# Altium PCB volume_knob.PcbDoc
Units mil, origin at the board's own origin, x right, y up, seen from the top; angles counter-clockwise.
Board outline 748.03 x 629.92 mil, 2 copper layers (Top Layer, Bottom Layer), stack 13.78 mil thick; 20 components, 16 nets, 77 pads, 37 vias.
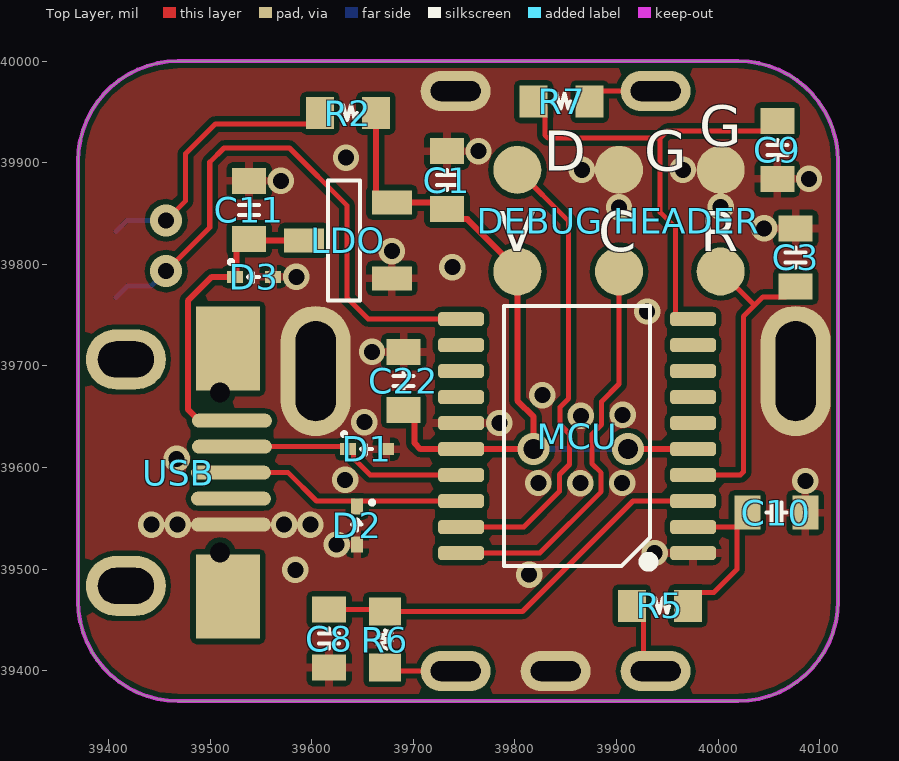
[diagram p0: Top Layer view]
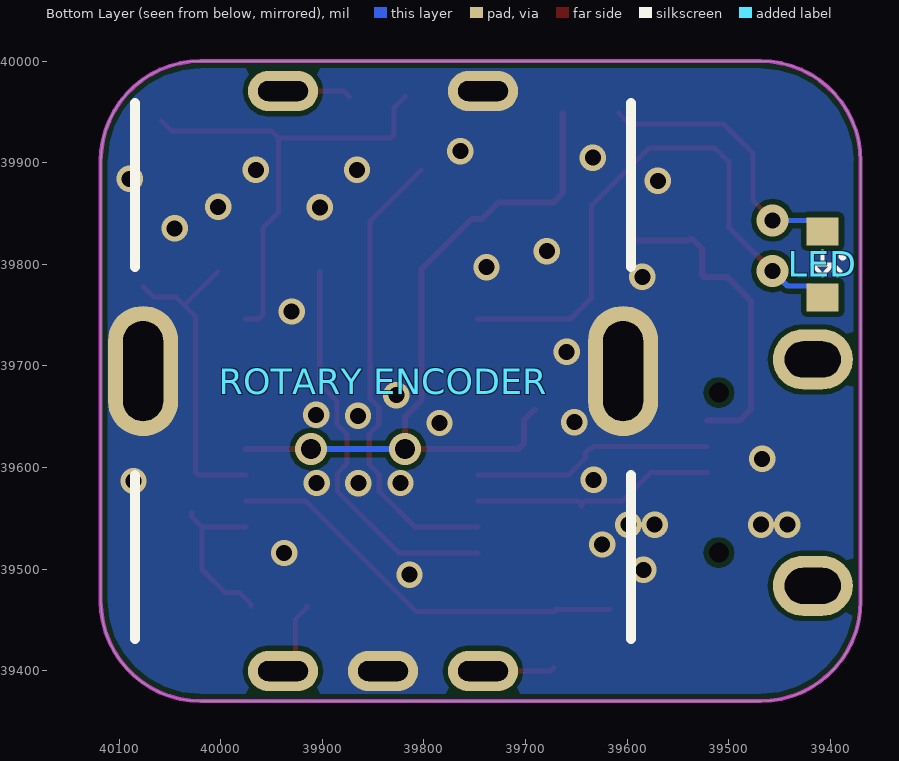
[diagram p1: Bottom Layer view, seen from below]
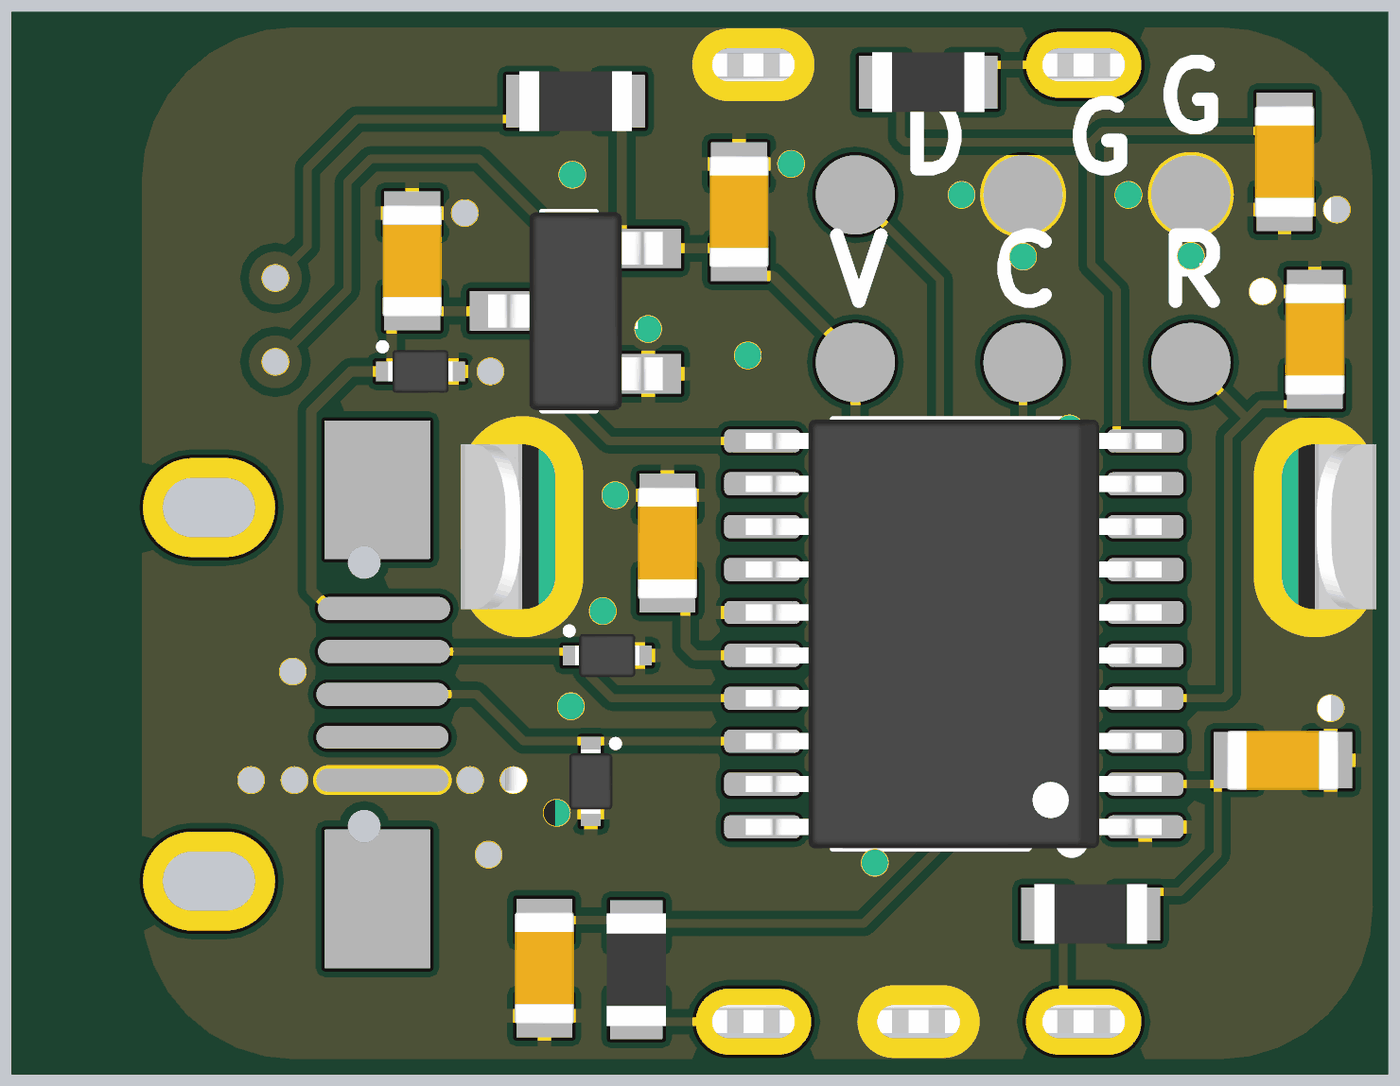
[diagram p2: 3D render of the assembled board from above, using the file's embedded part models]

## Layer stack, top to bottom
Top Solder: solder mask 1, SM-001, Dk 4
Top Layer: signal copper 1.378
Dielectric 1: core 11.0236, Core-043, Dk 4.3
Bottom Layer: signal copper 1.378
Bottom Solder: solder mask 1, SM-001, Dk 4

## Board outline
39370.08,39468.5 39370.08,39901.57 cw(c39468.5,39901.57) 39468.5,40000 40019.32,40000 40019.68,40000 cw(c40019.68,39901.57) 40118.11,39901.57 40118.11,39901.2 40118.11,39468.5 cw(c40019.68,39468.5) 40019.68,39370.08 39468.5,39370.08 cw(c39468.5,39468.5)
cut-out: 39300.45,39921.26

## Design rules (kind name [scope] priority, off if disabled: settings)
BoardOutlineClearance [All] p1: gap=5.91 ignorepadtopadclearanceinfootprint=FALSE
Clearance DP_DM [InNet('DP') vs InNet('DM')] p1: gap=5 ignorepadtopadclearanceinfootprint=FALSE
Clearance [All] p2: gap=5 ignorepadtopadclearanceinfootprint=FALSE
Height [All] p1: minheight=0 maxheight=39370.08 prefheight=500
HoleSize [All] p1: absolutevalues=TRUE maxlimit=137.8 minlimit=1 maxpercent=80.000 minpercent=20.000
MaxMinImpedance [InNet('DM') OR InNet('DP')] p1: minimum=10.00 maximum=95.00 // USB
MinimumAnnularRing [All] p1: minimumring=5.12
MinimumSolderMaskSliver [All] p1: minsoldermaskwidth=7.87
PolygonConnect PolygonConnect_GNDVIA [All vs (PadViaLibraryTemplate='via_gnd_stitch') OR InComponent('DEBUG HEADER') OR IsThruPin OR (IsPad AND ((AsMM(PadXSize_AllLayers)>1.65) OR (AsMM(PadYSize_AllLayers)>1.65)))] p1: connectstyle=Direct reliefconductorwidth=10 reliefentries=4 polygonreliefangle="90 Angle" airgapwidth=10
PolygonConnect [All] p2: connectstyle=Relief reliefconductorwidth=8 reliefentries=4 polygonreliefangle="90 Angle" airgapwidth=5
RoutingVias [All] p1: holewidth=28 width=50 viastyle="Through Hole" minholewidth=28 minwidth=50 maxholewidth=28 maxwidth=50 useviatemplates=TRUE viatemplateguid#1={01846E4F-6DB4-44A2-AA7D-F1F57DFDC0E3} viatemplateguid#2={B02223F9-9C95-4C5A-B5ED-C43D17FE1F61} viatemplateguid#3={EDE2DCAF-383A-401C-9A87-A8980C9C8582} viatemplatename#1=via_gnd_stitch viatemplatename#2=via_power viatemplatename#3=via_signal_routing
SilkToSilkClearance [All] p1 off: silktosilkclearance=10
SilkToSolderMaskClearance [IsPad] p1 off: minsilkscreentomaskgap=10 clearancetoexposedcopper=TRUE
SolderMaskExpansion [All] p1: expansion=1.97 istentingtop=FALSE
Width [All] p1: maxlimit=40 minlimit=5 preferedwidth=5 minimp=50.000000 maximp=50.000000 favimp=50.000000
25 further rules are at their usual default settings.

## Components (designator, comment, footprint, x,y, rotation, side; value= is the part's Value field where it differs from the comment)
C1 "2.2uF" CAPC1608X07L 39733.2,39882.81 r270 top
C3 "100nF" CAPC1608X07L 40076.42,39806.71 r270 top
C8 "3.3nF" CAPC1608X07L 39617.1,39431.59 r90 top
C9 "100nF" CAPC1608X07L 40058.4,39912.66 r90 top
C10 "3.3nF" CAPC1608X07L 40057.33,39555.57 r0 top
C11 "2.2uF" CAPC1608X07L 39538.34,39853.48 r270 top
C22 "100nF" CAPC1608X07L 39690.49,39685.15 r270 top
D1 "TVS_DIODE" SODFL98X40-2L 39654.58,39618.03 r0 top
D2 "TVS_DIODE" SODFL98X40-2L 39644.83,39542.9 r270 top
D3 "TVS_DIODE" SODFL98X40-2L 39543.29,39787.56 r0 top
"DEBUG HEADER" "SWD" CON5 39802.5,39892.87 r0 top
LDO "3.3v / 200mA" SOT95P237X110-3L 39635.69,39823.56 r180 top
LED "20mA" SMT_LED_0603 39407.52,39799.82 r270 bottom
MCU "STM32F042F6P6" TSOP65P630X120-20L 39861.2,39630.93 r180 top
R2 "520r" RESC1608X05L 39635.74,39948.74 r0 top
R5 "120" RESC1608X05L 39942.81,39463.84 r0 top
R6 "120" RESC1608X05L 39672.01,39430.61 r90 top
R7 "2K" RESC1608X05L 39845.93,39960.15 r0 top
"ROTARY ENCODER" "ROTARY_ENCODER" PEC12R-4XXXF-SXXXX_1 39840.2,39694.88 r180 bottom
USB "USB Micro B" "USB MICRO B JLCPCB" 39469.38,39594.89 r270 top

## Footprints (in the part's own frame and the unit in brackets; to place one, negate y for a bottom-side part, rotate by r counter-clockwise, add the part's x,y. Pads: shape width x height; smd on the part's side, far side on the other; paste and mask are expansions set on the pad)
CAPC1608X07L [mm] "MLCC 0603"
  rrect1% 0.65x0.85 smd: 1(-0.725,0) 2(0.725,0)
  silkscreen extent -0.25,-0.25 0.25,0.25, body extent -0.85,-0.45 0.85,0.45, height 0.7
CON5 [mm] "4 Pin 2.54 header"
  round 1.2 smd: 1(0,0) 2(2.54,0) 3(5.08,0) 4(0,-2.54) 5(2.54,-2.54) 6(5.08,-2.54)
PEC12R-4XXXF-SXXXX_1 [mm] "Rotary encoder"
  oval 1.75x1 hole 0.5 slot 1.25 at 0 deg: 1(-2.5,-7.5) 2(0,-7.5) 3(2.5,-7.5) 4(-2.5,7) 5(2.5,7)
  rrect100% 1.75x3.25 hole 1 slot 2.5 at 90 deg: 2(-6,0)
  oval 1.75x3.25 hole 1 slot 2.5 at 90 deg: 2(6,0)
  silkscreen extent -6.2,-6.7 6.2,6.7, body extent -6.92,-7.67 6.92,7.18, height 26.5
RESC1608X05L [mm] "0603 SMT Resistor"
  rrect1% 0.7x0.8 smd: 1(-0.7,0) 2(0.7,0)
  silkscreen extent -0.22,-0.18 0.22,0.2, body extent -0.85,-0.45 0.85,0.45, height 0.5
SMT_LED_0603 [mm] "SMT LED 0603"
  rrect1% 0.7x0.8 smd: 1(-0.825,0) 2(0.825,0)
  silkscreen extent -0.33,-0.25 0.28,0.55, body extent -0.8,-0.4 0.8,0.4, height 0.8
SODFL98X40-2L [mm] "SODFL, 0.6x1.0mm"
  rrect1% 0.4x0.3 smd: 1(-0.475,0) 2(0.475,0)
  silkscreen extent -0.62,-0.13 0.13,0.42, body extent -0.49,-0.33 0.49,0.33, height 0.4
SOT95P237X110-3L [mm] "SOT23x3 2.90x2.37mm Pitch 0.95mm"
  rrect1% 1x0.6 smd: 1(-1.1,0.95) 2(-1.1,-0.95) 3(1.1,0)
  silkscreen extent -0.3,-1.5 0.5,1.5, body extent -1.32,-1.5 1.32,1.5, height 1.1
TSOP65P630X120-20L [mm] "TSOPx20 6.45x4.35mm Pitch 0.65mm"
  rrect50% 1.15x0.35 smd: 1(-2.9,2.925) 2(-2.9,2.275) 3(-2.9,1.625) 4(-2.9,0.975) 5(-2.9,0.325) 6(-2.9,-0.325) 7(-2.9,-0.975) 8(-2.9,-1.625) 9(-2.9,-2.275) 10(-2.9,-2.925) 11(2.9,-2.925) 12(2.9,-2.275) 13(2.9,-1.625) 14(2.9,-0.975) 15(2.9,-0.325) 16(2.9,0.325) 17(2.9,0.975) 18(2.9,1.625) 19(2.9,2.275) 20(2.9,2.925)
  silkscreen extent -1.91,-3.25 1.83,3.27, body extent -3.15,-3.25 3.15,3.25, height 1.2
"USB MICRO B JLCPCB" [mm] "USB Micro B Receptacle"
  rrect100% 0.35x2 smd: 1(-1.3,1.325) 2(-0.65,1.325) 3(0,1.3) 4(0.65,1.3) 5(1.3,1.3)
  oval 0x0.5 hole 0.5 unplated paste+0 mask+0: B(-2,1.025) B(2,1.025)
  rrect1% 2.1x1.6 smd: S(-3.1,1.225) S(3.1,1.225)
  oval 1.5x2 hole 0.9 slot 1.4 at 90 deg: S(-2.83,-1.325) S(2.83,-1.325)

## Part data
C1 C11 C22: library part CAP_CERAMIC, "MLCC", Notes="Any suitable"
C3 C8 C9 C10: library part CAP_CERAMIC, "Ceramic capacitor", Notes="Any suitable"
D1 D2 D3: Supplier Part Number 1=C312244, Notes="Any suitable USB TVS diodes"
"DEBUG HEADER": "SWD Debug Header"
LDO: library part LDO, "LDO", Supplier Part Number 1=C479053, Notes="Or similar"
LED: library part LED, "LED", Notes="Any suitable"
R2 R5 R6 R7: library part RESISTOR, "Resistor 1%", Notes="Any suitable 1%"
"ROTARY ENCODER": "Generic Rotary Encoder", Notes="Any suitable"
USB: library part USB_SOCKET, "USB Receptacle", Supplier Part Number 1=C397452

## Via types
v1: diameter 25.98, hole 15.75, Top Layer to Bottom Layer, tented both sides, 33 vias
v2: diameter 31.5, hole 15.75, Top Layer to Bottom Layer, tented both sides, 2 vias
v3: diameter 31.5, hole 19.68, Top Layer to Bottom Layer, tented both sides, 2 vias

## Nets (pads, with @x,y where several pads share a name; then routed paths per layer and width w, separated by ;. In a path a pad name is that pad's centre, name@x,y a point inside that pad or via, vN(x,y) a via of type N, cw(c..) or ccw(c..) an arc to the next point about the centre after c; other vN are vias at no path point)
\RESET: "DEBUG HEADER.6" C3.2 MCU.4 | length 314.8
  Top Layer w5: MCU.4 40021.94,39592.54 40024.87,39595.47 40024.87,39748.56 40035.84,39759.53 ; 40002.5,39792.87 40035.84,39759.53 ; C3.2 40066.2,39767.96 40044.26,39767.96 40035.84,39759.53
BTN: C9.2 MCU.10 R7.1 | length 478.8
  Top Layer w5: R7.1@39818.37,39965.15 39829.51,39954.01 39829.51,39927.11 39832.44,39924.18 39943.02,39924.18 ; MCU.10 39962.59,39746.09 39958.27,39750.4 39958.27,39835.9 39943.02,39851.15 39943.02,39924.18 ; C9.2 40048.16,39930.96 39949.81,39930.96 39943.02,39924.18
DM: D1.1 MCU.17 USB.2 | length 240.4
  Top Layer w5: USB.2 39633.53,39620.48 39635.88,39618.13 39637.75,39618.13 39641.15,39614.73 39641.15,39609.05 39657.66,39592.54 MCU.17
DP: D2.1 MCU.18 USB.3 | length 244.8
  Top Layer w5: USB.3 39576.92,39594.89 39604.83,39566.97 D2.1@39641.42,39566.97 ; D2.1@39641.45,39566.95 D2.1@39644.83,39563.57 ; MCU.18 39648.23,39566.95 D2.1@39644.83,39563.55 ; D2.1@39644.83,39563.55 D2.1 D2.1@39644.83,39563.57
GND: "DEBUG HEADER.2" "DEBUG HEADER.3" "ROTARY ENCODER.2" "ROTARY ENCODER.5" C1.1 C3.1 C8.1 C9.1 C10.2 C11.1 C22.1 D1.2 D2.2 D3.2 LDO.1 MCU.1 MCU.15 USB.5
  other v1: 39814.13,39494.45 39583.87,39499.26 39937.55,39515.77 39624.53,39524.2 39442.29,39543.71 39468.19,39543.71 39572.83,39543.71 39598.73,39543.71 39823.05,39584.67 39864.43,39584.65 39905.65,39584.73 40085.87,39586.64 39632.92,39587.79 39467.15,39608.48 39784.67,39643.72 39651.95,39644.55 39864.9,39650.81 39906.02,39651.71 39827.11,39671.08 39659.4,39713.7 39930.21,39753.5 39585,39787.56 39738.42,39797.09 39678.99,39812.85 40045.27,39835.26 39902.5,39856 40002.5,39856.47 39569.69,39882.03 40089.55,39884.11 39865.84,39892.87 39965.31,39892.87 39633.8,39904.88 39764.22,39911.35
LED_A: LED.1 R2.1 | length 276.1
  Top Layer w5: v2(39456.8,39843.27) 39475.96,39862.44 39475.96,39908.92 39505.21,39938.17 39597.61,39938.17 R2.1
  Bottom Layer w5: LED.1 39418.49,39843.27 v2(39456.8,39843.27)
LED_C: LED.2 MCU.11 | length 561
  Top Layer w5: v2(39456.8,39793.27) 39499.7,39836.17 39499.7,39900.38 39513.75,39914.43 39578.16,39914.43 39634.97,39857.62 39634.97,39766.83 39655.71,39746.09 MCU.11
  Bottom Layer w5: LED.2 39418.77,39778.59 39442.11,39778.59 v2(39456.8,39793.27)
ROT_CHA: "ROTARY ENCODER.1" R5.1 | length 73.9
  Top Layer w5: R5.1 39915.25,39461.88 39926.53,39450.59 39926.53,39411.69 39938.62,39399.61
ROT_CHB: "ROTARY ENCODER.3" R6.1 | length 71.2
  Top Layer w5: R6.1 39675.46,39399.61 39741.77,39399.61
ROTARYA: C10.1 MCU.2 R5.2 | length 186
  Top Layer w5: R5.2 39970.37,39465.81 39981.65,39477.09 39996.06,39477.09 40018.49,39499.52 C10.1@40018.49,39541.36 ; MCU.2 C10.1@40018.49,39541.36 ; C10.1@40018.49,39541.36 C10.1@40028.79,39551.66 ; C10.1@40018.49,39541.36 C10.1@40028.79,39551.66 ; C10.1@40028.79,39551.66 C10.1 C10.1@40028.79,39551.66
ROTARYB: C8.2 MCU.3 R6.2 | length 404.1
  Top Layer w5: C8.2 39670.04,39460.14 R6.2 39807.45,39458.17 39916.24,39566.95 MCU.3
SW: "ROTARY ENCODER.4" R7.2 | length 67.3
  Top Layer w5: R7.2@39873.48,39965.15 39878.8,39970.47 39938.62,39970.47
SWCLK: "DEBUG HEADER.5" MCU.20 | length 394.5
  Top Layer w5: MCU.20 39824.52,39515.77 39884.92,39576.16 39884.92,39594.74 39875.74,39603.92 39875.74,39632.66 39885.39,39642.32 39885.39,39664.97 39902.5,39682.07 39902.5,39792.87
SWDIO: "DEBUG HEADER.1" MCU.19 | length 460.2
  Top Layer w5: MCU.19 39808.74,39541.36 39843.93,39576.56 39843.93,39593.14 39853.76,39602.97 39853.76,39632.91 39844.41,39642.26 39844.41,39659.3 39852.99,39667.88 39852.99,39842.38 39802.5,39892.87
VCC3v3: "DEBUG HEADER.4" C1.2 C22.2 LDO.2 MCU.5 MCU.16 R2.2 | length 747
  Top Layer w6: R2.2 39663.29,39869.77 39672.11,39860.96 LDO.2 39726.51,39860.96 C1.2 39743,39844.47 39753.33,39844.47 39802.5,39795.3 39802.5,39792.87 39802.5,39665.87 39818.5,39649.87 v3(39818.5,39618.13) MCU.16 39707.08,39618.13 39701.29,39623.92 39701.29,39646.82 39691.5,39656.61 C22.2 ; v3(39911.24,39618.13) MCU.5
  Bottom Layer w6: v3(39818.5,39618.13) v3(39911.24,39618.13)
VCC5: C11.2 D3.1 LDO.3 USB.1 | length 310.1
  Top Layer w6: USB.1 39489.32,39646.07 39478.12,39657.28 39478.12,39763.9 39501.77,39787.56 D3.1 39526.04,39789.01 39526.04,39815.14 39535.84,39824.94 C11.2 39539.73,39823.56 LDO.3
pads on no net: MCU.6 MCU.7 MCU.8 MCU.9 MCU.12 MCU.13 MCU.14 USB.4 USB.B USB.S

## Polygon pours and split planes (outlines as drawn)
GND on Top Layer "GND_TOP" (solid, remove dead copper, pour order 0): 39370.08,40000 39370.08,39370.08 40118.11,39370.08 40118.11,40000
GND on Bottom Layer "GND_BOTTOM" (solid, remove dead copper, pour order 1): 39370.08,40000 39370.08,39370.08 40118.11,39370.08 40118.11,40000

## Keep-outs
Keep-Out Layer:
  lines w4: 40019.32,40000 39468.5,40000 ccw(c39468.5,39901.57) 39370.08,39901.57 39370.08,39468.5 ccw(c39468.5,39468.5) 39468.5,39370.08 40019.68,39370.08 ccw(c40019.68,39468.5) 40118.11,39468.5 ; 40019.68,40000 cw(c40019.68,39901.57) 40118.11,39901.57 ; 40118.11,39901.2 40118.11,39468.5 ; 40118.11,39468.5 40118.11,39468.5

## Silkscreen, mask and mechanical layers (free items; w line width, h text height)
Top Overlay:
  text "G" at 39981.38,39916.49 h39.37
  text "D" at 39828.49,39891.99 h39.37
  text "G" at 39927.27,39891.99 h39.37
  text "V" at 39783.49,39812.99 h39.37
  text "C" at 39882.27,39812.99 h39.37
  text "R" at 39982.53,39812.99 h39.37
Bottom Solder:
  text "Tiny USB" at 40058.31,39671.26 h98.43
  text "Volume" at 40041.6,39525.24 h98.43
  text "Knob" at 39953.89,39442.13 h98.43
Board:
  lines w4: 40019.32,40000 39468.5,40000 ccw(c39468.5,39901.57) 39370.08,39901.57 39370.08,39468.5 ccw(c39468.5,39468.5) 39468.5,39370.08 40019.68,39370.08 ccw(c40019.68,39468.5) 40118.11,39468.5 ; 40019.68,40000 cw(c40019.68,39901.57) 40118.11,39901.57 ; 40118.11,39901.2 40118.11,39468.5 ; 40118.11,39468.5 40118.11,39468.5

## Dimensions
40118.11,39370.08 to 40118.11,40000 on Dimensions
39370.08,39370.08 to 40118.11,39370.08 on Dimensions